# Altium PCB SimpleFOCDriver.PcbDoc
Units mm, origin at the board's own origin, x right, y up, seen from the top; angles counter-clockwise.
Board outline 54.21 x 53.25 mm, 2 copper layers (Top Layer, Bottom Layer), stack 1.671 mm thick; 28 components, 26 nets, 99 pads, 45 vias.
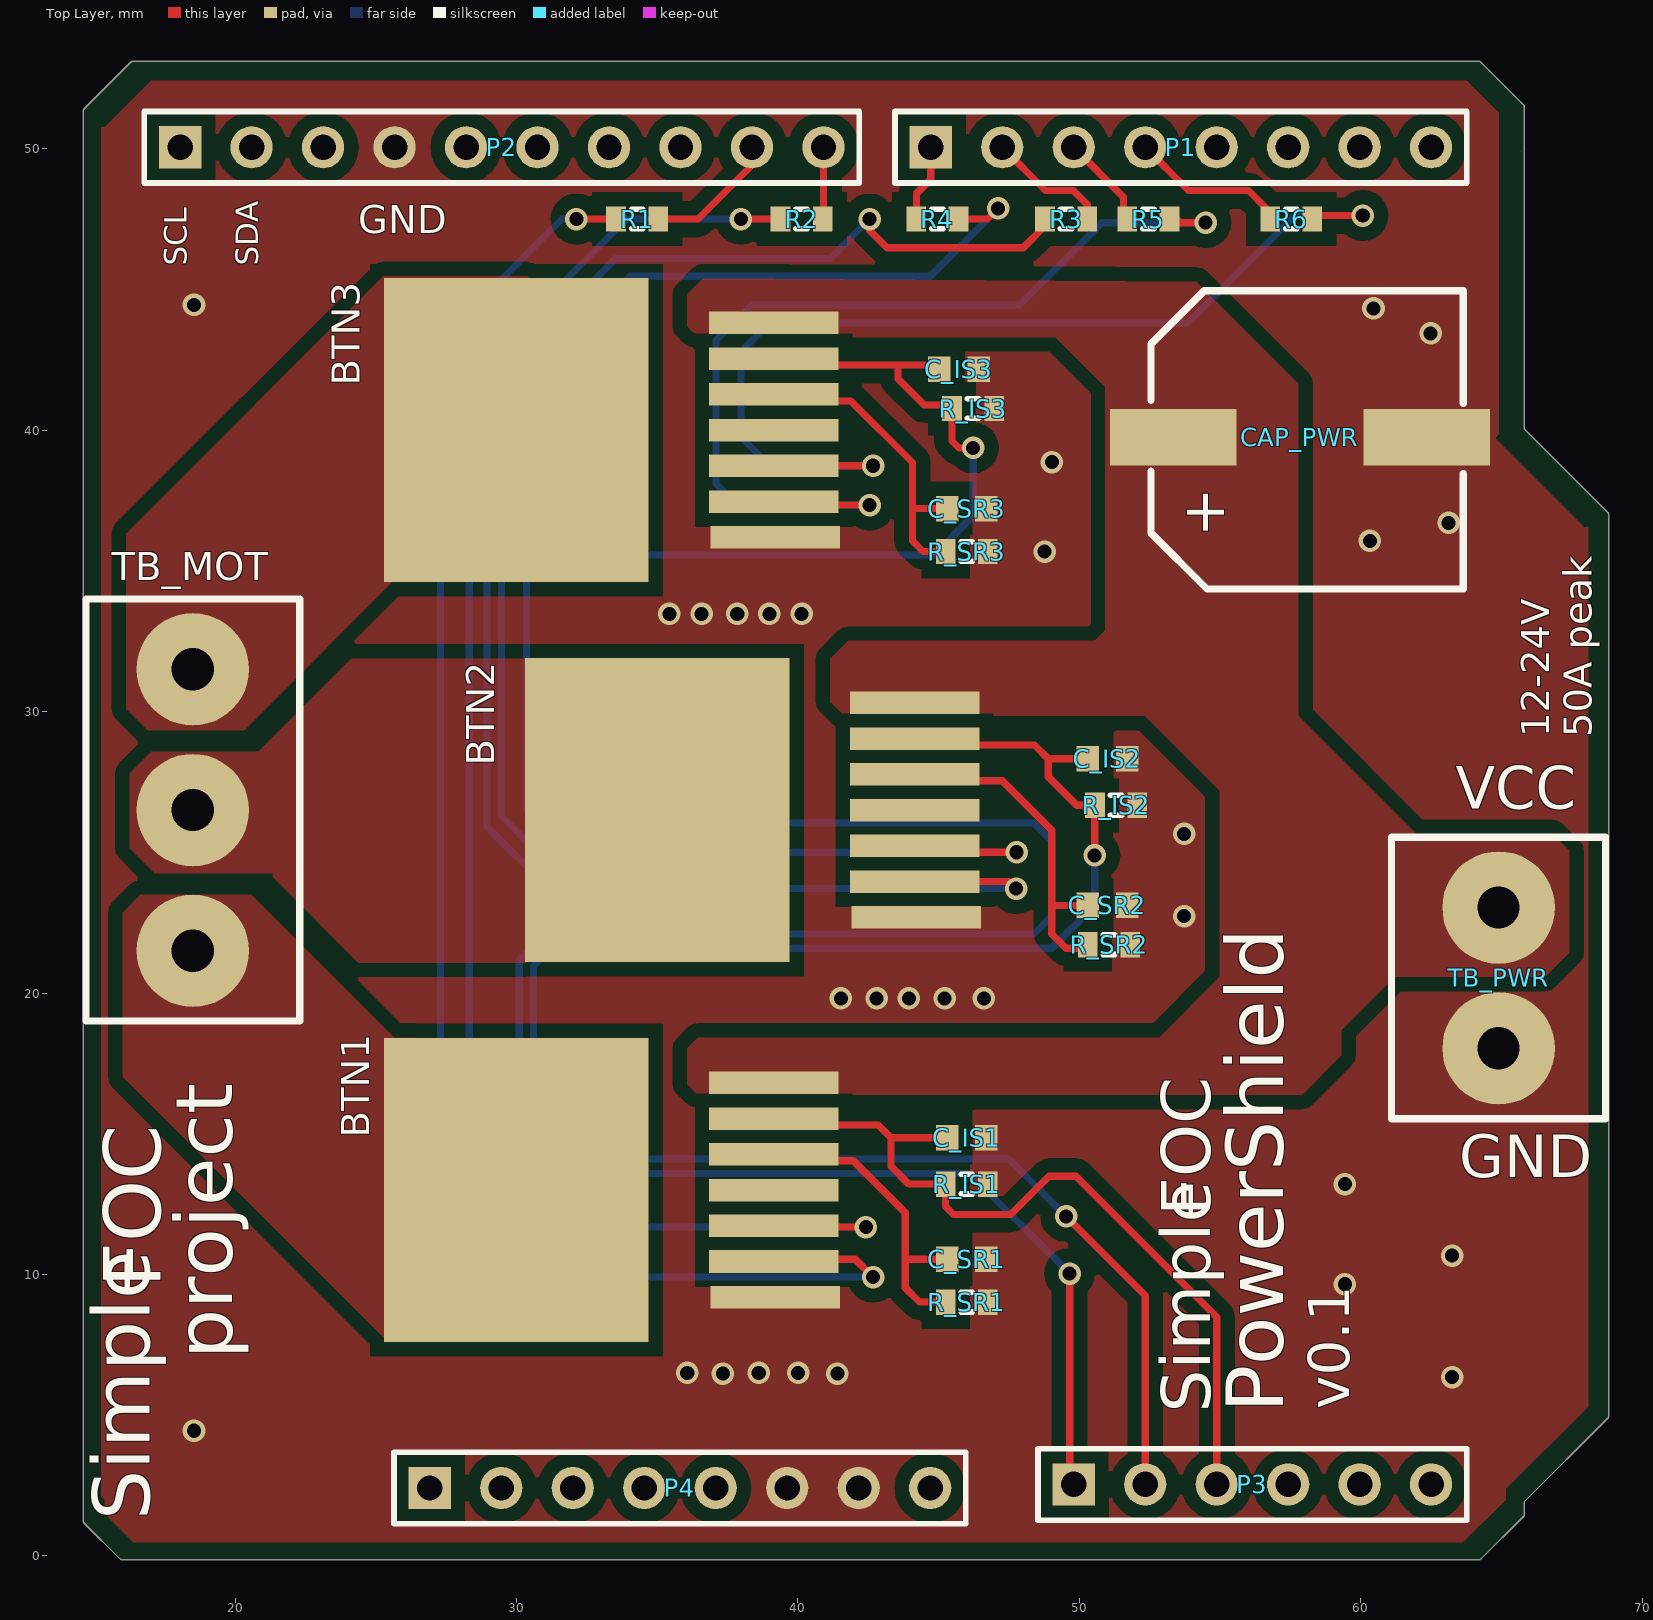
[diagram p0: Top Layer view]
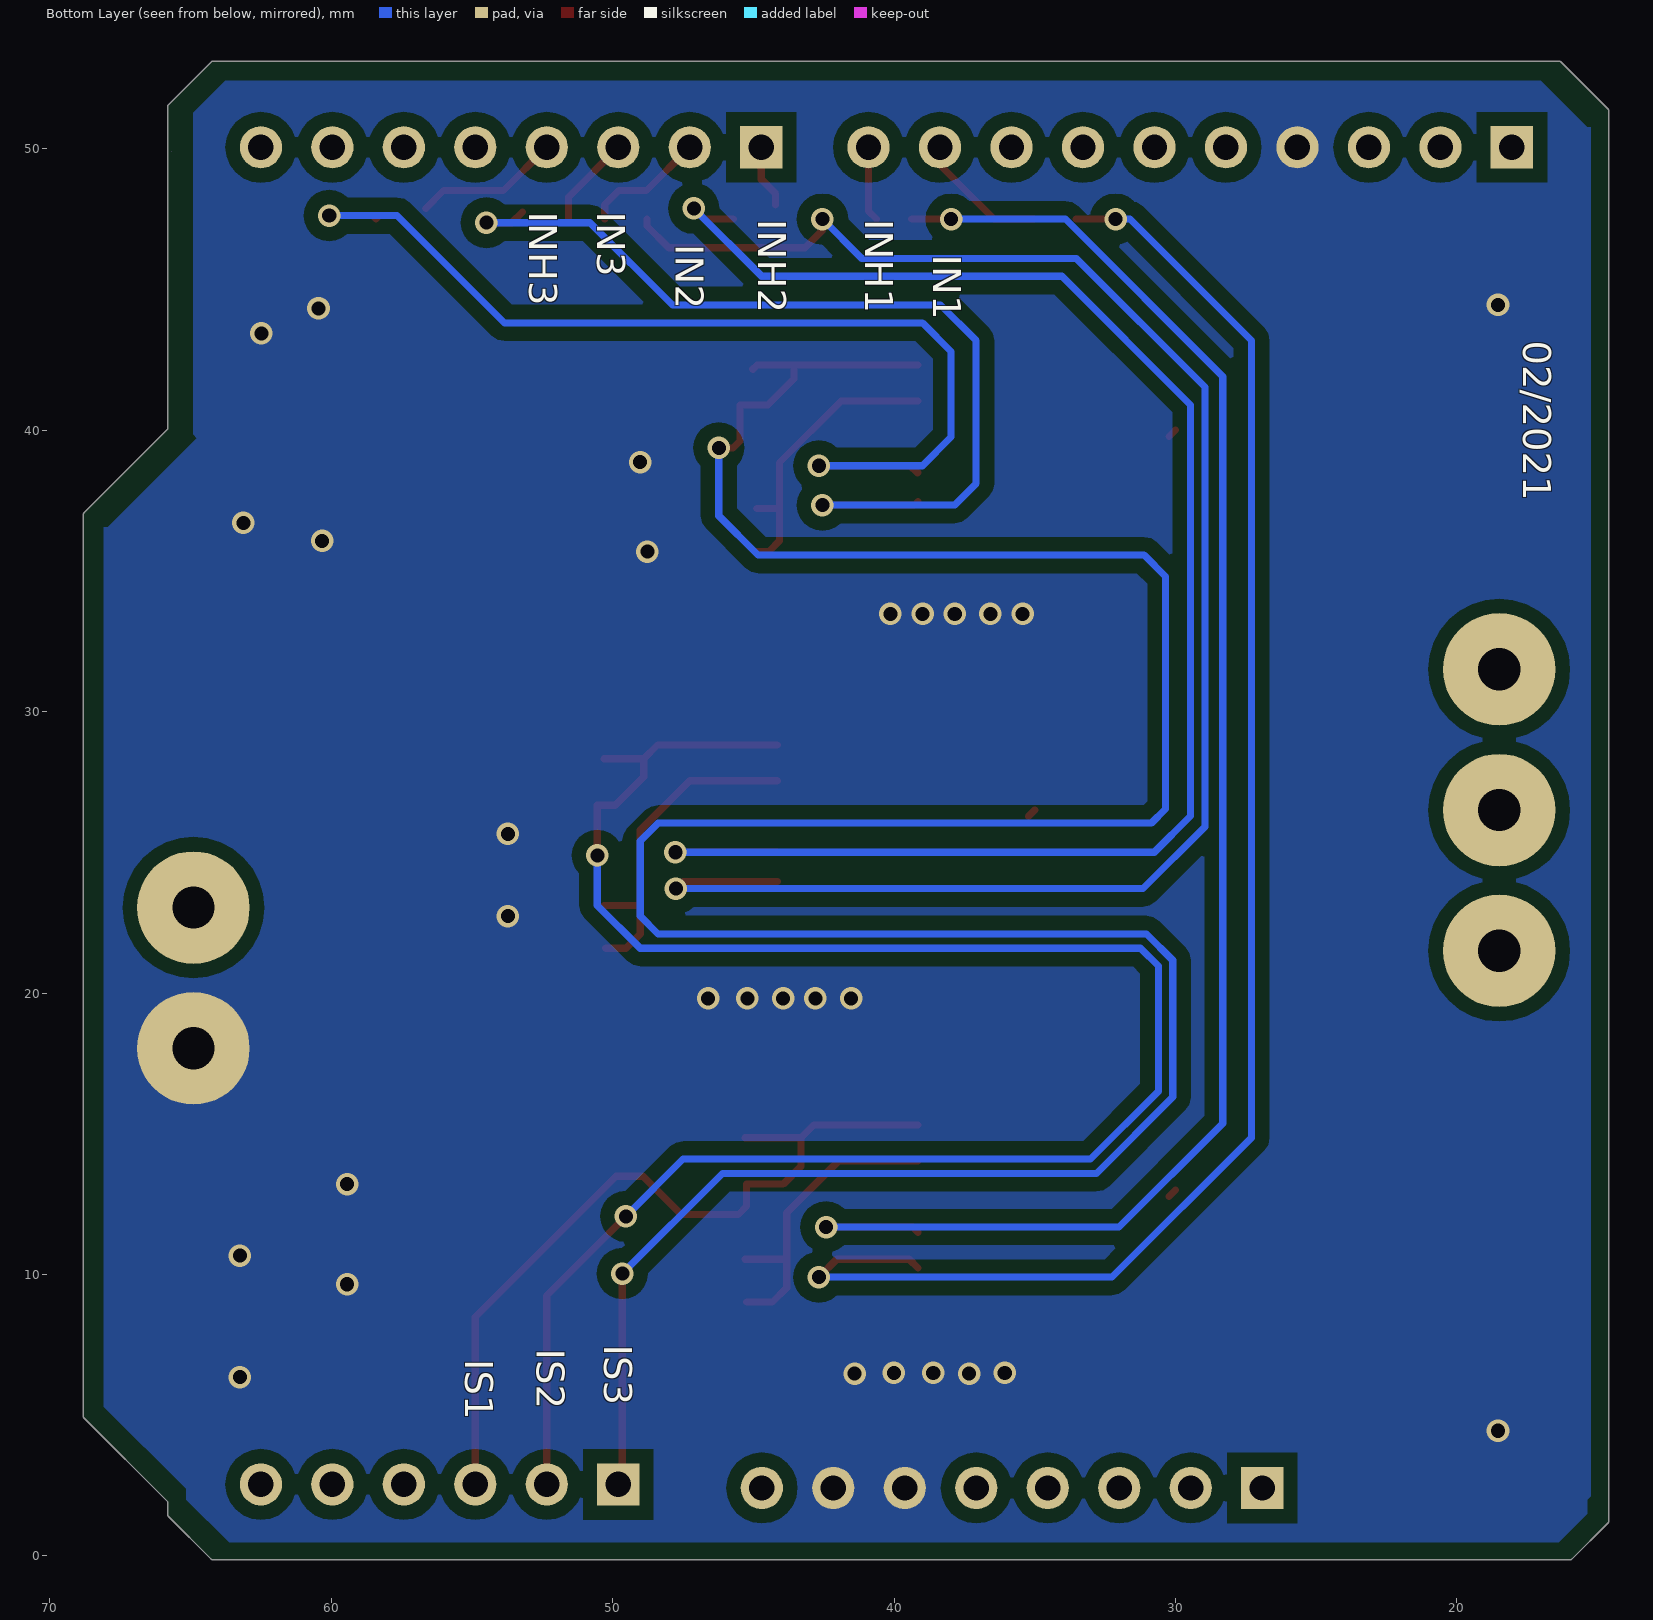
[diagram p1: Bottom Layer view, seen from below]

## Layer stack, top to bottom
Top Solder: solder mask 0.0102, Solder Resist, Dk 3.5
Top Layer: signal copper 0.0356
Dielectric 1: dielectric 1.6, FR-4, Dk 4.8
Bottom Layer: signal copper 0.0356
Bottom Solder: solder mask 0.0102, Solder Resist, Dk 3.5

## Board outline
14.642,1.161 cw(c14.732,1.252) 14.605,1.252 14.605,1.27 14.605,51.331 cw(c14.732,51.331) 14.642,51.421 16.293,53.072 cw(c16.383,52.982) 16.384,53.109 64.186,53.109 cw(c64.186,52.982) 64.276,53.072 65.776,51.572 cw(c65.686,51.482) 65.813,51.482 65.813,40.035 68.776,37.072 68.776,37.073 cw(c68.686,36.982) 68.813,36.982 68.813,4.982 cw(c68.686,4.982) 68.776,4.891 68.776,4.892 65.813,1.929 65.813,1.482 cw(c65.686,1.482) 65.776,1.392 64.276,-0.108 cw(c64.186,-0.018) 64.186,-0.145 16.002,-0.145 cw(c16.002,-0.018) 15.911,-0.107 15.912,-0.108
cut-out: 65.659,49.911

## Design rules (kind name [scope] priority, off if disabled: settings)
Clearance Clearance_1 [InNetClass('pwr_line')] p1: gap=0.5 ignorepadtopadclearanceinfootprint=TRUE
Clearance [All] p2: gap=0.254 ignorepadtopadclearanceinfootprint=FALSE except(0: Arc-Hole Track-Hole SMDPad-Hole THPad-Hole Via-Hole Fill-Hole Poly-Hole Region-Hole Text-Hole)
PolygonConnect power_lines [InNetClass('pwr_line')] p1: connectstyle=Direct reliefconductorwidth=0.254 reliefentries=4 polygonreliefangle="90 Angle" airgapwidth=0.254
PolygonConnect [All] p2: connectstyle=Relief reliefconductorwidth=0.254 reliefentries=4 polygonreliefangle="90 Angle" airgapwidth=0.254
RoutingVias [All] p1: holewidth=0.5 width=0.8 viastyle="Through Hole" minholewidth=0.3 minwidth=0.5 maxholewidth=0.711 maxwidth=1.27
SolderMaskExpansion [All] p1: expansion=0.102
Width Width_1 [InNetClass('pwr_line')] p1: maxlimit=2 minlimit=0.254 preferedwidth=0.254 minimp=50.000000 maximp=50.000000 favimp=50.000000
Width [All] p2: maxlimit=0.254 minlimit=0.254 preferedwidth=0.254
30 further rules are at their usual default settings.

## Classes and differential pairs
net class pwr_line: GND NetBTN1_8 NetBTN2_8 NetBTN3_8 VCC

## Components (designator, comment, footprint, x,y, rotation, side; value= is the part's Value field where it differs from the comment)
BTN1 "BTN8982" BTN8982 30,13 r180 top
BTN2 "BTN8982" BTN8982 35,26.5 r180 top
BTN3 "BTN8982" BTN8982 30,40 r180 top
C_IS1 "Cap Semi" 1608[0603] 46,14.859 r180 top value=1nF
C_IS2 "Cap Semi" 1608[0603] 51,28.321 r180 top value=1nF
C_IS3 "Cap Semi" 1608[0603] 45.72,42.164 r180 top value=1nF
C_SR1 "Cap Semi" 1608[0603] 46,10.541 r180 top value=100nF
C_SR2 "Cap Semi" 1608[0603] 51,23.114 r180 top value=100nF
C_SR3 "Cap Semi" 1608[0603] 46,37.211 r180 top value=100nF
CAP_PWR "VEJ471M1ETR1010" VEJ471M1ETR1010 61.34,43.151 r180 top
P1 "Header 8" HDR1X8 44.72,50.05 r0 top locked
P2 "Header 10" HDR1X10 18.05,50.05 r0 top locked
P3 "Header 6" HDR1X6 49.8,2.54 r0 top locked
P4 "Header 8" HDR1X8 26.92,2.413 r0 top locked
R1 "Res3" J1-0603 34.29,47.5 r180 top value=10k
R2 "Res3" J1-0603 40.132,47.5 r180 top value=10k
R3 "Res3" J1-0603 49.53,47.5 r180 top value=10k
R4 "Res3" J1-0603 44.958,47.5 r0 top value=10k
R5 "Res3" J1-0603 52.451,47.5 r180 top value=10k
R6 "Res3" J1-0603 57.531,47.5 r0 top value=10k
R_IS1 "Res3" J1-0603 46,13.208 r180 top value=1K
R_IS2 "Res3" J1-0603 51.308,26.67 r180 top value=1K
R_IS3 "Res3" J1-0603 46.228,40.767 r180 top value=1K
R_SR1 "Res3" J1-0603 46,9.017 r180 top value=0.51k
R_SR2 "Res3" J1-0603 51.054,21.717 r180 top value=0.51k
R_SR3 "Res3" J1-0603 46,35.687 r180 top value=0.51k
TB_MOT "TB002-500-03BE" TB002-500-03BE 18.5,21.5 r90 top
TB_PWR "TB002-500-02BE" TB002-500-02BE 64.897,23.034 r270 top

## Footprints (in the part's own frame and the unit in brackets; to place one, negate y for a bottom-side part, rotate by r counter-clockwise, add the part's x,y. Pads: shape width x height; smd on the part's side, far side on the other; paste and mask are expansions set on the pad)
1608[0603] [mm] "Chip Capacitor, Body 1.6x0.8mm, IPC High Density"
  rect 0.8x0.9 smd: 1(-0.7,0) 2(0.7,0)
  body extent -0.87,-0.48 0.87,0.48, height 1.3
BTN8982 [mm] "Infineon BTN8982TA"
  rect 4.6x0.8 smd: 1(-9.2,3.81) 2(-9.15,2.54) 3(-9.15,1.27) 4(-9.15,0) 5(-9.15,-1.27) 6(-9.15,-2.54) 7(-9.15,-3.81)
  rect 9.4x10.8 smd: 8(0,0)
  body extent -10.77,-4.97 4.18,5.03, height 4.4
HDR1X6 [mm] "Connector; Header; 6 Position"
  rect 1.5x1.5 hole 0.9: 1(0,0)
  round 1.5 hole 0.9: 2(2.54,0) 3(5.08,0) 4(7.62,0) 5(10.16,0) 6(12.7,0)
  silkscreen extent -1.27,-1.27 13.97,1.27
HDR1X8 [mm] "Connector; Header; 8 Position"
  rect 1.5x1.5 hole 0.9: 1(0,0)
  round 1.5 hole 0.9: 2(2.54,0) 3(5.08,0) 4(7.62,0) 5(10.16,0) 6(12.7,0) 7(15.24,0) 8(17.78,0)
  silkscreen extent -1.27,-1.27 19.05,1.27
HDR1X10 [mm] "Connector; Header; 10 Position"
  rect 1.5x1.5 hole 0.9: 1(0,0)
  round 1.5 hole 0.9: 2(2.54,0) 3(5.08,0) 4(7.62,0) 5(10.16,0) 6(12.7,0) 7(15.24,0) 8(17.78,0) 9(20.32,0) 10(22.86,0)
  silkscreen extent -1.27,-1.27 24.13,1.27
J1-0603 [mm] "Chip Resistor, Body 1.6x0.8mm, IPC High Density"
  rect 0.7x0.9 smd: 1(-0.75,0) 2(0.75,0)
  silkscreen extent -0.2,-0.35 0.2,0.35, body extent -0.85,-0.48 0.85,0.48, height 0.9
TB002-500-02BE [mm] "TB002-500-02BE"
  round 4 hole 1.5: 1(0,0) 2(5,0)
  silkscreen extent -2.5,-3.8 7.5,3.8, body extent -2.5,-4.4 7.5,4.6, height 13.55
TB002-500-03BE [mm] "TB002-500-03BE"
  round 4 hole 1.5: 1(0,0) 2(5,0) 3(10,0)
  Top Layer lines w0.254: 0,0 0,-0.08
  silkscreen extent -2.5,-3.8 12.5,3.8, body extent -2.57,-5.2 13.17,4.6, height 13.8
VEJ471M1ETR1010 [mm]
  rect 4.5x2 smd: 1(-1,3.4) 2(8,3.4)
  silkscreen extent -2.3,-1.8 8.8,8.8, body extent -2.8,-1.85 9,8.65, height 10.3

## Part data
C_IS1 C_IS2 C_IS3 C_SR1 C_SR2 C_SR3: "Capacitor (Semiconductor SIM Model)", LatestRevisionDate=29-May-2009, LatestRevisionNote="IPC-7351 Footprint Added.", PackageDescription="Chip Capacitor", PackageReference=C1206, Published=8-Jun-2000, Publisher="Altium Limited"
CAP_PWR: Supplier Part Number 1=140-VEJ471M1ETR1010, Supplier 1=Mouser
P1 P4: "Header, 8-Pin", LatestRevisionDate=17-Jul-2002, LatestRevisionNote="Re-released for DXP Platform.", Publisher="Altium Limited"
P2: "Header, 10-Pin", LatestRevisionDate=17-Jul-2002, LatestRevisionNote="Re-released for DXP Platform.", Publisher="Altium Limited"
P3: "Header, 6-Pin", LatestRevisionDate=17-Jul-2002, LatestRevisionNote="Re-released for DXP Platform.", Publisher="Altium Limited"
R1 R2 R3 R4 R5 R6 R_IS1 R_IS2 R_IS3 R_SR1 R_SR2 R_SR3: "Resistor", LatestRevisionDate=29-May-2009, LatestRevisionNote="IPC-7351 Footprint Added.", PackageDescription="Chip Resistor", PackageReference=J1-0603, Published=8-Jun-2000, Publisher="Altium Limited"
TB_MOT: Supplier Part Number 1=490-TB002-500-03BE, Supplier 1=Mouser
TB_PWR: Supplier Part Number 1=490-TB002-500-02BE, Supplier 1=Mouser
BTN1 BTN2 BTN3: Supplier 1=RSComponents

## Via types
v1: diameter 0.8, hole 0.5, Top Layer to Bottom Layer, 45 vias

## Nets (pads, with @x,y where several pads share a name; then routed paths per layer and width w, separated by ;. In a path a pad name is that pad's centre, name@x,y a point inside that pad or via, vN(x,y) a via of type N, cw(c..) or ccw(c..) an arc to the next point about the centre after c; other vN are vias at no path point)
+5: P4.5
GND: BTN1.1 BTN2.1 BTN3.1 C_IS1.1 C_IS2.1 C_IS3.1 C_SR1.1 C_SR2.1 C_SR3.1 CAP_PWR.1 P2.4 P4.6 P4.7 R_IS1.1 R_IS2.1 R_IS3.1 R_SR1.1 R_SR2.1 R_SR3.1 TB_PWR.2
  other v1: 18.542,4.445 63.246,6.35 37.338,6.477 41.402,6.477 36.068,6.5 38.608,6.5 40.005,6.5 59.436,9.652 63.246,10.668 59.436,13.208 41.529,19.812 42.799,19.812 43.942,19.812 45.212,19.812 46.609,19.812 53.721,22.733 53.721,25.654 35.433,33.473 36.576,33.473 37.846,33.473 38.989,33.473 40.132,33.473 48.768,35.687 60.325,36.068 63.119,36.703 49.022,38.862 62.484,43.434 60.452,44.323 18.542,44.45
NetBTN1_2: BTN1.2 R1.2 | length 57.7
  Top Layer w0.254: v1(32.131,47.498) R1.2@33.54,47.498 ; BTN1.2@39.15,10.23 39.461,10.541 42.037,10.541 v1(42.672,9.906)
  Bottom Layer w0.254: v1(32.131,47.498) 31.623,47.498 27.305,43.18 27.305,14.859 32.258,9.906 v1(42.672,9.906)
NetBTN1_3: BTN1.3 R2.2 | length 58.9
  Top Layer w0.254: v1(37.973,47.498) R2.2@39.382,47.498 ; BTN1.3@39.15,11.5 39.334,11.684 v1(42.418,11.684)
  Bottom Layer w0.254: v1(37.973,47.498) 33.909,47.498 28.321,41.91 28.321,15.367 32.004,11.684 v1(42.418,11.684)
NetBTN1_5: BTN1.5 C_SR1.2 R_SR1.2 | length 11.2
  Top Layer w0.254: BTN1.5@39.15,14.04 41.967,14.04 43.815,12.192 43.815,10.541 ; R_SR1.2 44.323,9.017 43.815,9.525 43.815,10.541 ; C_SR1.2 43.815,10.541
NetBTN1_6: BTN1.6 C_IS1.2 P3.3 R_IS1.2 | length 28.7
  Top Layer w0.254: BTN1.6@39.15,15.31 42.856,15.31 43.307,14.859 ; C_IS1.2 43.307,14.859 ; P3.3 54.88,8.493 49.886,13.487 48.92,13.487 47.564,12.131 45.532,12.131 45.25,12.413 R_IS1.2 43.942,13.208 43.307,13.843 43.307,14.859
NetBTN1_8: BTN1.8 TB_MOT.1 | length 0.3
  Top Layer w0.254: BTN1.8 BTN1.8@30.23,12.77
NetBTN2_2: BTN2.2 R3.2 | length 62.5
  Top Layer w0.254: v1(42.545,47.498) 42.545,47.104 43.167,46.482 48.006,46.482 48.78,47.256 R3.2@48.78,47.498 ; BTN2.2 47.503,23.96 v1(47.752,23.711)
  Bottom Layer w0.254: v1(42.545,47.498) 41.148,46.101 33.528,46.101 28.956,41.529 28.956,25.908 31.153,23.711 v1(47.752,23.711)
NetBTN2_3: BTN2.3 R4.2 | length 59.2
  Top Layer w0.254: BTN2.3@44.15,25 v1(47.771,25) ; R4.2@45.708,47.498 46.736,47.498 v1(47.117,47.879)
  Bottom Layer w0.254: v1(47.117,47.879) 44.704,45.466 34.036,45.466 29.464,40.894 29.464,26.289 30.753,25 v1(47.771,25)
NetBTN2_5: BTN2.5 C_SR2.2 R_SR2.2 | length 12
  Top Layer w0.254: BTN2.5@44.15,27.54 47.263,27.54 49.022,25.781 49.022,23.114 ; R_SR2.2@50.25,21.59 49.53,21.59 49.022,22.098 49.022,23.114 ; C_SR2.2 49.022,23.114
NetBTN2_6: BTN2.6 C_IS2.2 P3.2 R_IS2.2 | length 69.3
  Top Layer w0.254: BTN2.6@44.15,28.81 48.406,28.81 48.895,28.321 ; v1(49.53,12.065) 52.34,9.255 P3.2 ; C_IS2.2 48.895,28.321 ; v1(50.546,24.892) 50.546,26.67 49.911,26.67 48.895,27.686 48.895,28.321
  Bottom Layer w0.254: v1(49.53,12.065) 47.498,14.097 33.02,14.097 30.607,16.51 30.607,20.955 31.242,21.59 49.022,21.59 50.546,23.114 v1(50.546,24.892)
NetBTN2_8: BTN2.8 TB_MOT.2 | length 0.3
  Top Layer w0.254: BTN2.8 BTN2.8@35.23,26.27
NetBTN3_2: BTN3.2 R5.1 | length 34.9
  Top Layer w0.254: BTN3.2 39.272,37.338 v1(42.545,37.338) ; R5.1@53.201,47.752 53.582,47.371 v1(54.483,47.371)
  Bottom Layer w0.254: v1(42.545,37.338) 37.846,37.338 37.084,38.1 37.084,43.18 38.354,44.45 47.879,44.45 50.8,47.371 v1(54.483,47.371)
NetBTN3_3: BTN3.3 R6.2 | length 37.8
  Top Layer w0.254: BTN3.3@39.15,38.5 39.169,38.481 39.423,38.735 v1(42.672,38.735) ; R6.2@58.281,47.625 58.408,47.498 58.535,47.625 v1(60.071,47.625)
  Bottom Layer w0.254: v1(42.672,38.735) 38.989,38.735 37.973,39.751 37.973,42.799 38.985,43.811 53.844,43.811 57.658,47.625 v1(60.071,47.625)
NetBTN3_5: BTN3.5 C_SR3.2 R_SR3.2 | length 10.4
  Top Layer w0.254: BTN3.5@39.15,41.04 41.876,41.04 44.069,38.847 44.069,37.211 ; 44.843,35.687 44.45,35.687 44.069,36.068 44.069,37.211 ; 44.893,37.211 44.069,37.211
NetBTN3_6: BTN3.6 C_IS3.2 P3.1 R_IS3.2 | length 114.2
  Top Layer w0.254: BTN3.6@39.15,42.31 44.874,42.31 C_IS3.2 ; 43.561,42.291 43.561,41.824 44.491,40.894 45.478,40.894 R_IS3.2 45.478,39.617 45.725,39.37 v1(46.228,39.37) ; v1(49.657,10.033) 49.657,2.683 P3.1
  Bottom Layer w0.254: v1(46.228,39.37) 46.228,36.957 44.831,35.56 31.115,35.56 30.353,34.798 30.353,26.543 30.861,26.035 48.387,26.035 49.022,25.4 49.022,22.733 48.387,22.098 31.032,22.098 30.099,21.165 30.099,16.3 32.81,13.589 46.101,13.589 v1(49.657,10.033)
NetBTN3_8: BTN3.8 TB_MOT.3 | length 0.3
  Top Layer w0.254: BTN3.8 BTN3.8@30.23,39.77
NetP1_1: P1.1 R4.1 | length 2.3
  Top Layer w0.254: 44.208,48.006 44.208,48.399 44.72,48.911 P1.1
NetP1_2: P1.2 R3.1 | length 4.9
  Top Layer w0.254: P1.2@47.26,49.514 P1.2 48.796,48.514 49.784,48.514 50.28,48.018 R3.1@50.28,47.498
NetP1_3: P1.3 R5.2 | length 3.3
  Top Layer w0.254: P1.3 51.574,48.276 51.574,48.121 51.574,47.764 R5.2@51.574,47.498
NetP1_4: P1.4 R6.1 | length 5.2
  Top Layer w0.254: P1.4 53.876,48.514 56.007,48.514 R6.1@56.642,47.879
NetP1_5: P1.5
NetP2_8: P2.8
NetP2_9: P2.9 R1.1 | length 4.8
  Top Layer w0.254: R1.1@35.04,47.498 36.449,47.498 38.37,49.419 P2.9
NetP2_10: P2.10 R2.1 | length 2.7
  Top Layer w0.254: R2.1@40.628,47.498 40.91,47.78 P2.10
VCC: BTN1.7 BTN2.7 BTN3.7 CAP_PWR.2 TB_PWR.1
pads on no net: BTN1.4 BTN2.4 BTN3.4 P1.6 P1.7 P1.8 P2.1 P2.2 P2.3 P2.5 P2.6 P2.7 P3.4 P3.5 P3.6 P4.1 P4.2 P4.3 P4.4 P4.8

## Polygon pours and split planes (outlines as drawn)
GND on Top Layer "Top Layer-GND" (solid, pour order 22): 17.022,52.419 15.371,50.768 15.244,50.768 15.244,2.127 15.371,2 15.371,1.492 16.387,0.476 63.631,0.476 65.155,2 65.155,2.381 68.076,5.302 68.076,36.544 67.949,36.544 64.774,39.719 64.901,39.846 64.901,51.276 63.758,52.419
VCC on Top Layer "Top Layer-VCC" (solid, pour order 18): 36.639,45.402 36.068,44.831 36.068,43.688 36.449,43.307 49.149,43.307 50.927,41.529 50.927,32.893 50.546,32.512 41.783,32.512 41.148,31.877 41.148,30.353 41.656,29.845 52.324,29.845 54.991,27.178 54.991,20.574 52.832,18.415 36.449,18.415 36.068,18.034 36.068,16.764 36.449,16.383 57.912,16.383 59.309,17.78 59.309,18.669 61.214,20.574 66.548,20.574 67.409,21.435 67.409,25.047 66.802,25.654 61.976,25.654 57.785,29.845 57.785,41.656 54.162,45.279
NetBTN1_8 on Top Layer "Top Layer-NetBTN1_8" (solid, pour order 6): 20.574,23.495 16.637,23.495 16.002,22.86 16.002,17.018 25.4,7.62 26.416,7.62 26.416,18.415 25.654,18.415
NetBTN2_8 on Top Layer "Top Layer-NetBTN2_8" (solid, pour order 4): 31.115,32.004 30.988,31.877 24.13,31.877 20.828,28.575 17.018,28.575 16.256,27.813 16.256,25.146 17.145,24.257 21.336,24.257 21.336,24.13 24.384,21.082 30.353,21.082
NetBTN3_8 on Top Layer "Top Layer-NetBTN3_8" (solid, pour order 0): 30.48,45.466 25.273,45.466 16.129,36.322 16.129,34.036 16.129,30.099 16.891,29.337 20.32,29.337 26.162,35.179 29.083,35.179
GND on Bottom Layer "Bottom Layer-GND" (solid, pour order 24): 17.022,52.419 15.371,50.768 15.244,50.768 15.244,2.127 15.371,2 15.371,1.492 16.387,0.476 63.631,0.476 65.155,2 65.155,2.381 68.076,5.302 68.076,36.544 67.949,36.544 64.774,39.719 64.901,39.846 64.901,51.276 63.758,52.419
no net on Bottom Layer "Bottom Layer-No Net" (solid, pour order 16): 36.576,44.831
no net on Bottom Layer "Bottom Layer-No Net 1" (solid, pour order 14): 53.213,22.352
no net on Bottom Layer "Bottom Layer-No Net 2" (solid, pour order 10): 34.925,46.736

## Silkscreen, mask and mechanical layers (free items; w line width, h text height)
Top Overlay:
  text "GND" at 24.384,46.99 h1
  text "SCL" at 18.288,45.847 h0.8 r90
  text "SDA" at 20.828,45.847 h0.8 r90
  text "12-24V / 50A peak" at 68.199,29.083 h1 r90
  text "VCC" at 63.373,26.543 h1.5
  text "GND" at 63.5,13.462 h1.5
  text "FOC" at 55.245,12.065 h3 r90
  text "FOC" at 18.034,9.525 h3.5 r90
  text "project" at 20.574,6.985 h3.5 r90
  text "v0.1" at 60.071,5.207 h2.5 r90
  text "Simple" at 55.245,5.08 h3 r90
  text "PowerShield" at 57.912,5.08 h3.5 r90
  text "Simple" at 17.653,1.27 h3.5 r90
Bottom Overlay:
  text "IN3" at 50.546,47.752 h1 r90
  text "INH3" at 52.959,47.752 h1 r90
  text "INH1" at 41.021,47.498 h1 r90
  text "INH2" at 44.831,47.498 h1 r90
  text "IN2" at 47.752,46.609 h1 r90
  text "IN1" at 38.608,46.228 h1 r90
  text "02/2021" at 17.653,43.18 h1 r90
  text "IS3" at 50.292,7.493 h1 r90
  text "IS2" at 52.705,7.366 h1 r90
  text "IS1" at 55.245,6.985 h1 r90
Mechanical 1:
  lines w0.254: 14.732,1.252 16.002,-0.018 64.186,-0.018 65.686,1.482 65.686,1.982 68.686,4.982 68.686,36.982 65.686,39.982 65.686,51.482 64.186,52.982 16.383,52.982 14.732,51.331 14.732,1.27 14.732,1.252

## Text inside footprints (layer, text, board x,y; h text height)
CAP_PWR: Top Overlay "+" at 53.84,37.951 h1.52 r270